# Altium PCB LED.PcbDoc
Units mm, origin at the board's own origin, x right, y up, seen from the top; angles counter-clockwise.
Board outline 21.98 x 15.75 mm, 2 copper layers (Top Layer, Bottom Layer); 4 components, 4 nets, 16 pads, 4 vias.
Unrouted connection lines stored in the file: 1.
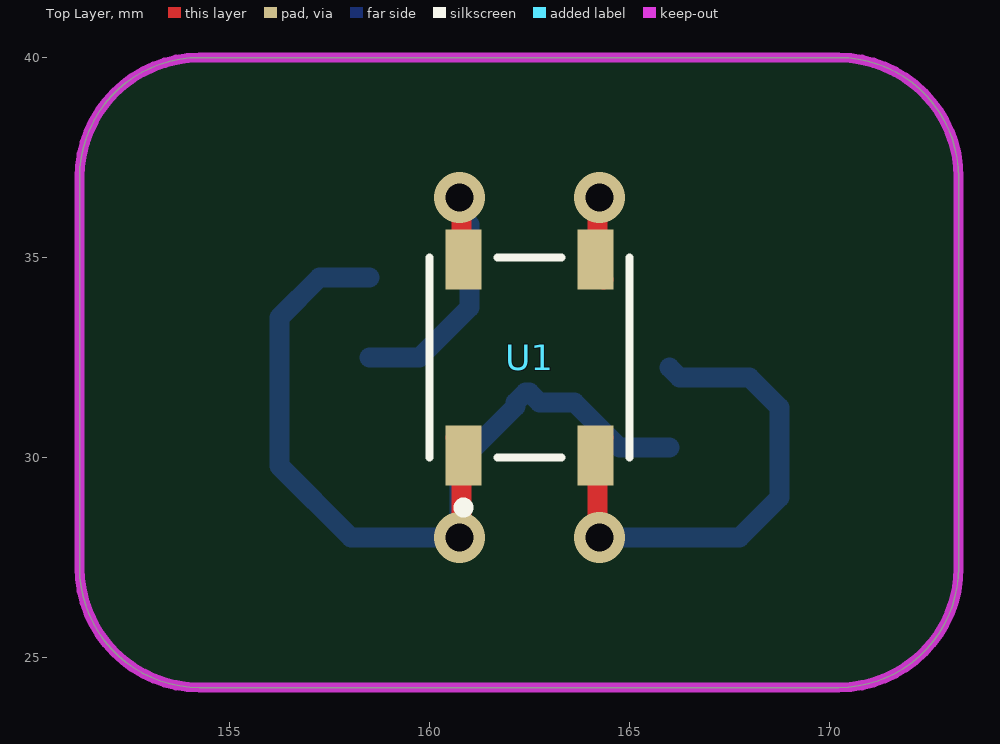
[diagram p0: Top Layer view]
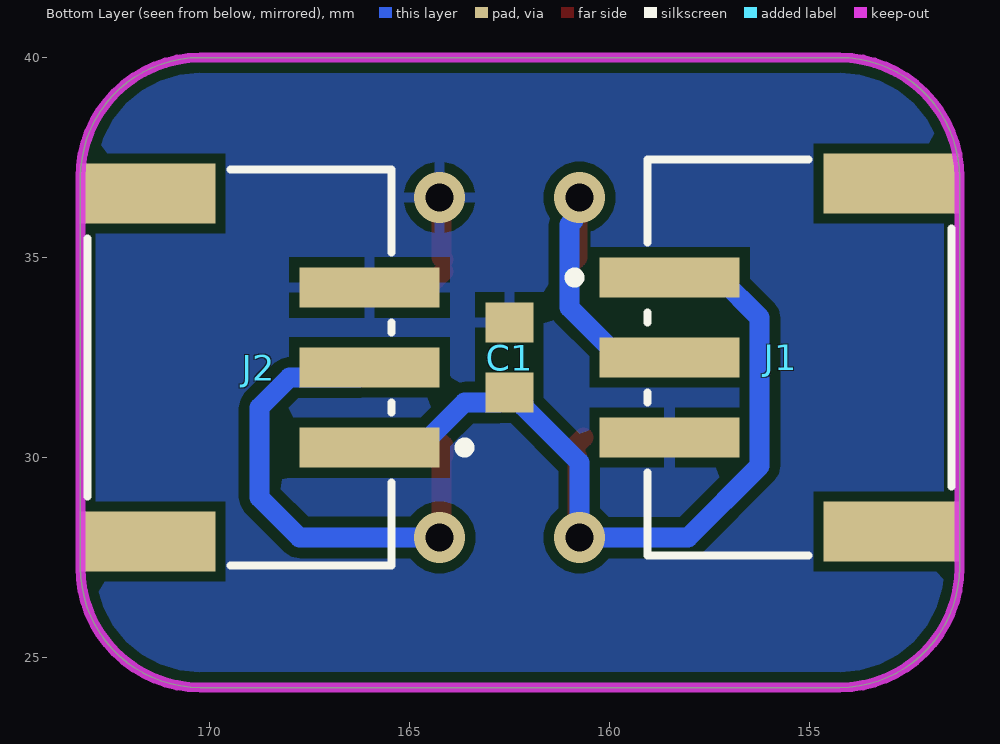
[diagram p1: Bottom Layer view, seen from below]
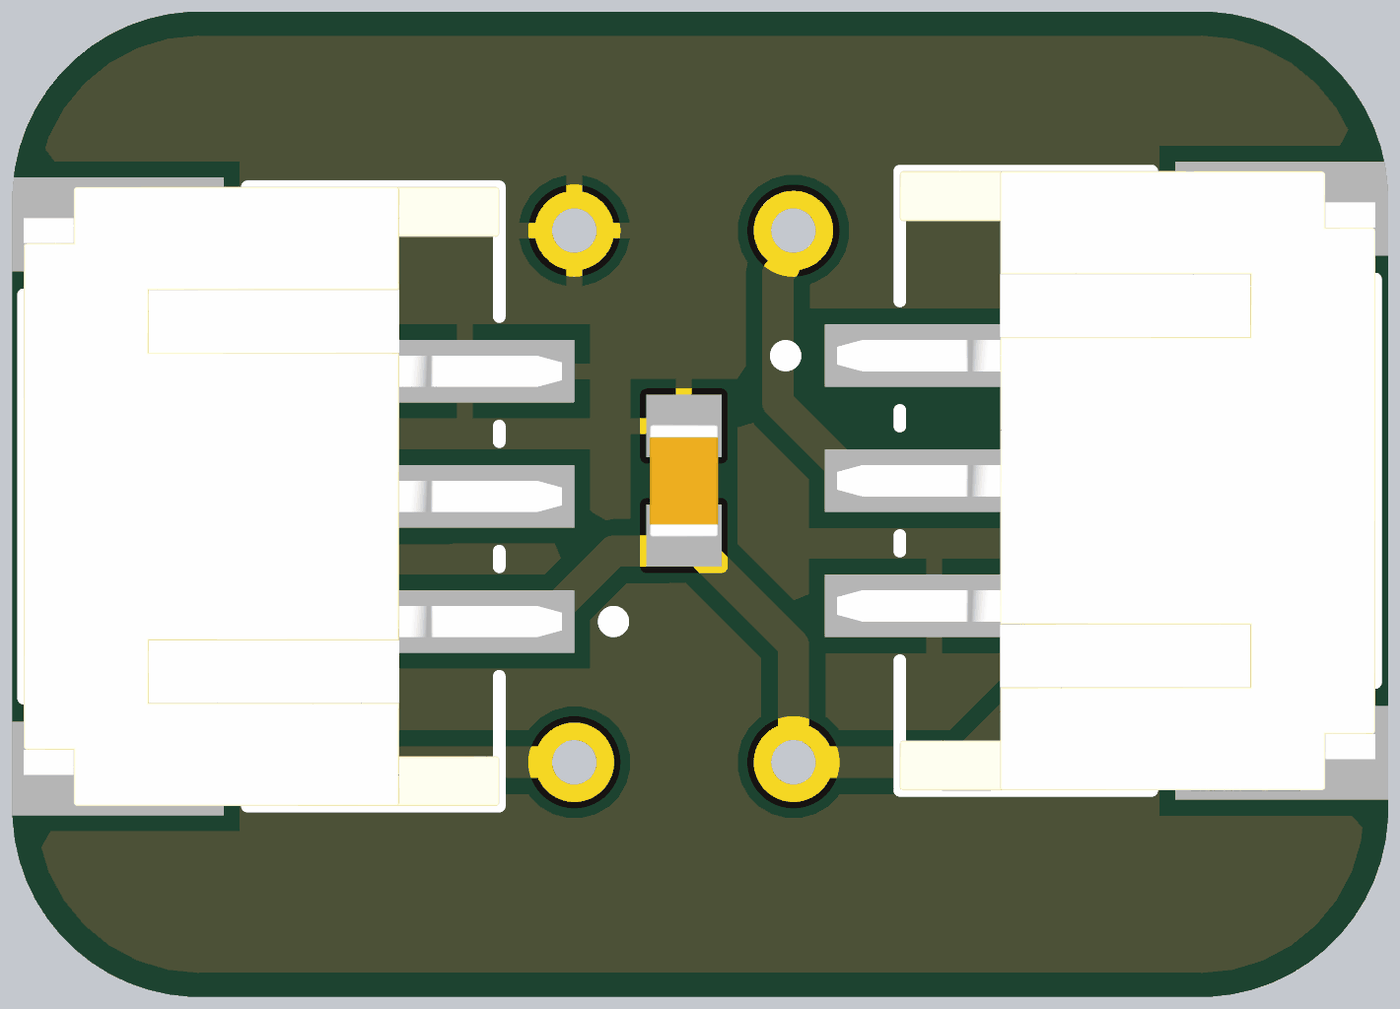
[diagram p2: 3D render of the assembled board from below, using the file's embedded part models]

## Layer stack, top to bottom
Top Solder: solder mask 0.0102, Solder Resist, Dk 3.5
Top Layer: signal copper 0.0356
Dielectric 1: dielectric 0.32, FR-4, Dk 4.8
Bottom Layer: signal copper 0.0356
Bottom Solder: solder mask 0.0102, Solder Resist, Dk 3.5

## Board outline
151.25,27.25 151.25,37 cw(c154.25,37) 154.25,40 170.228,40 cw(c170.228,37) 173.228,37 173.228,27.25 cw(c170.228,27.25) 170.228,24.25 154.25,24.25 cw(c154.25,27.25)

## Design rules (kind name [scope] priority, off if disabled: settings)
Clearance [All] p1: gap=0.254 ignorepadtopadclearanceinfootprint=FALSE
PolygonConnect [All] p1: connectstyle=Relief reliefconductorwidth=0.254 reliefentries=4 polygonreliefangle="90 Angle" airgapwidth=0.254
RoutingVias [All] p1: holewidth=0.711 width=1.27 viastyle="Through Hole" minholewidth=0.711 minwidth=1.27 maxholewidth=0.711 maxwidth=1.27
SolderMaskExpansion [All] p1: expansion=0.102 istentingtop=FALSE
SupplyNets "Schematic Supply Nets_1" [InNet('GND')] p1: voltage=0.000
SupplyNets "Schematic Supply Nets" [InNet('+5')] p2: voltage=0.000
Width [All] p1: maxlimit=1.5 minlimit=0.254 preferedwidth=0.5
30 further rules are at their usual default settings.

## Components (designator, comment, footprint, x,y, rotation, side; value= is the part's Value field where it differs from the comment)
C1 "Capacitor 100 nF 10 % 50V 0603" 3 162.5,32.5 r270 bottom value=100nF
J1 "S3B-PH-SM4-TB(LF)(SN)" FP-S3B-PH-SM4-TB_LF_SN-MFG 155.25,32.5 r270 bottom
J2 "S3B-PH-SM4-TB(LF)(SN)" FP-S3B-PH-SM4-TB_LF_SN-MFG 169.25,32.25 r90 bottom
U1 "WS2812B" ADAI-WS2812B_V 162.5,32.5 r90 top

## Footprints (in the part's own frame and the unit in brackets; to place one, negate y for a bottom-side part, rotate by r counter-clockwise, add the part's x,y. Pads: shape width x height; smd on the part's side, far side on the other; paste and mask are expansions set on the pad)
3 [mm] "Chip Capacitor, 2-Leads, Body 1.65x0.90mm, IPC Low Density"
  rect 1x1.2 smd: 1(-0.875,0) 2(0.875,0)
  body extent -0.9,-0.55 0.9,0.55, height 0.9
ADAI-WS2812B_V [mm] "SMD, 4-Leads, Body 5x5mm, Pitch 3.3mm"
  rect 1.5x0.9 smd: 1(-2.45,1.65) 2(-2.45,-1.65) 3(2.45,-1.65) 4(2.45,1.65)
  silkscreen extent -3.87,-2.5 2.5,2.5, body extent -2.7,-2.5 2.7,2.5, height 1.69
FP-S3B-PH-SM4-TB_LF_SN-MFG [mm]
  rect 1x3.5 smd paste+0 mask+0: 1(-2,-3.25) 2(0,-3.25) 3(2,-3.25)
  rect 1.5x3.4 smd paste+0 mask+0: 4(-4.35,2.3) 5(4.35,2.3)
  silkscreen extent -4.95,-5.75 4.95,3.8, body extent -4.95,-4.8 4.95,3.8, height 5.6

## Part data
C1: library part CMP-001-00092-5, "CAP CER 100 nF 50V X7R 0603", Capacitor Type=Ceramic, Case/Package=0603, LCSC Part Number=C14663, Tolerance=10%, Voltage Rating=50V
J1 J2: library part CMP-2000-07023-2, "CONN HEADER SMD R/A 3POS 2MM", Color=Natural, Contact Resistance=10mR, Current Rating=2A, Flammability Rating="UL94 V-0", Housing Color=Beige, Insulation Resistance=1GR, Max Operating Temperature=85°C, Max Voltage Rating (AC)=100V, Min Operating Temperature=-25°C, Connector Type=Header, Contact Finish - Mating=TIN, Contact Material="Copper Alloy", Contact Mating Length=0.13inch, Contact Plating=Tin, Contact Shape=Square, Contact Type="Male Pin", Depth=7.6mm, Fastening Type=Detent, Gender=Male, Height=9.4mm, Housing Material=Polyamide, Insulation Color=Natural, Insulation Material=Nylon, Lead Free="Lead Free", Lead Pitch=2mm, Length=9.9mm, Material=Polyamide, Max Current Rating=2A, Max Voltage Rating (DC)=100V, Mount="Surface Mount", Number of Contacts=3, Number of Poles=3, Number of Positions=3, Number of Rows=1, Orientation="Right Angle", Packaging="Tape and Reel", Pitch=2mm, REACH SVHC="No SVHC", Series=PH, Termination=Solder, Voltage Rating=100V, Voltage Rating (AC)=100V, Width=5mm, Working Voltage=100V
U1: library part CMP-007-00035-2, "Intelligent Control LED Integrated Light Source, 3.5 to 5.3 V, -25 to 80 degC, 4-Pin SMD, RoHS, Bulk", Manufacturer="Adafruit Industries", Package Description="4-Pin Surface Mount Device, Body 5 x 5 mm, Pitch 3.3 mm", Case/Package=WS2812B, Datasheet URL=https://cdn-shop.adafruit.com/datasheets/WS2812B.pdf, Datasheet Version=May-13, Manufacturer URL=https://www.adafruit.com/, Mounting Technology=SM, Package Reference=WS2812B, RoHS Compliant=False

## Via types
v1: diameter 1.27, hole 0.711, Top Layer to Bottom Layer, 4 vias

## Nets (pads, with @x,y where several pads share a name; then routed paths per layer and width w, separated by ;. In a path a pad name is that pad's centre, name@x,y a point inside that pad or via, vN(x,y) a via of type N, cw(c..) or ccw(c..) an arc to the next point about the centre after c; other vN are vias at no path point)
+5: C1.2 J1.1 J2.1 U1.1 | length 22.7
  Top Layer w0.5: U1.1@160.65,30.5 160.85,30.3 U1.1 160.8,30 160.8,28.05 v1(160.75,28)
  Bottom Layer w0.5: J1.1 157.25,34.5 156.246,33.496 156.246,29.791 158.037,28 v1(160.75,28) 160.75,29.875 162.15,31.275 162.15,31.375 162.4,31.625 C1.2 162.75,31.375 163.625,31.375 164.75,30.25 J2.1
GND: C1.1 J1.3 J2.3 U1.3 | length 1.9
  Top Layer w0.5: U1.3@164.15,34.65 U1.3@164.35,34.45 ; U1.3 164.2,35 164.2,36.45 v1(164.25,36.5)
NetJ1_2: J1.2 U1.4 | length 7.5
  Top Layer w0.5: v1(160.75,36.5) 160.8,36.45 160.8,35 U1.4
  Bottom Layer w0.5: J1.2 159.75,32.5 161,33.75 161,35.822 160.897,35.925 160.897,36.353 v1(160.75,36.5)
NetJ2_2: J2.2 U1.2 | length 13
  Top Layer w0.5: v1(164.25,28) 164.2,28.05 164.2,30 U1.2 164.15,30.3 U1.2@164.35,30.5
  Bottom Layer w0.5: v1(164.25,28) 167.75,28 168.75,29 168.75,31.25 168,32 166.25,32 J2.2
pads on no net: J1.4 J1.5 J2.4 J2.5

## Polygon pours and split planes (outlines as drawn)
GND on Bottom Layer "GND_L02_P000" (solid, pour order 0): 172.25,39.25 171.75,39.75 170.75,39.75 170.5,40 153.75,40 153.5,39.75 152.75,39.75 151.75,38.75 151.75,38.5 151.25,38 151.25,26.25 151.75,25.75 151.75,25.5 152.75,24.5 153.25,24.5 153.5,24.25 171.5,24.25 173.25,26 173.25,37.5 173,37.75 173,38.25

## Keep-outs
Keep-Out Layer:
  the board outline again, w0.254